# EAGLE board schematic (EAGLE 8.7.1)
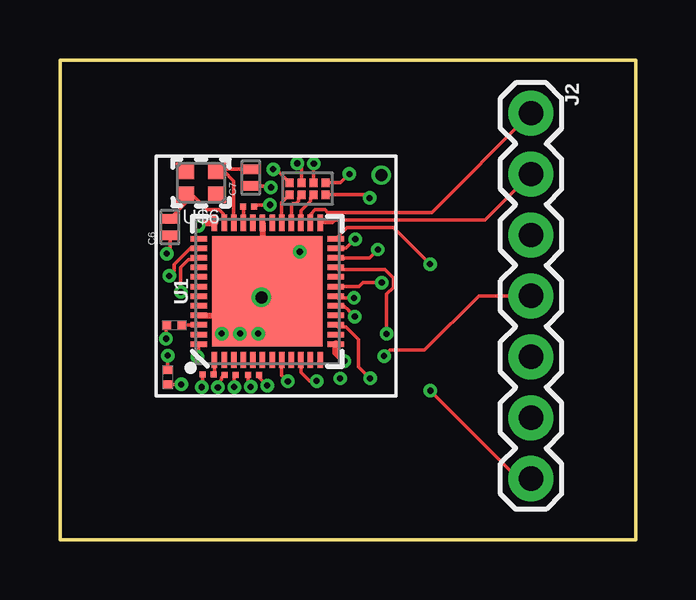
[diagram p0: board, top side]
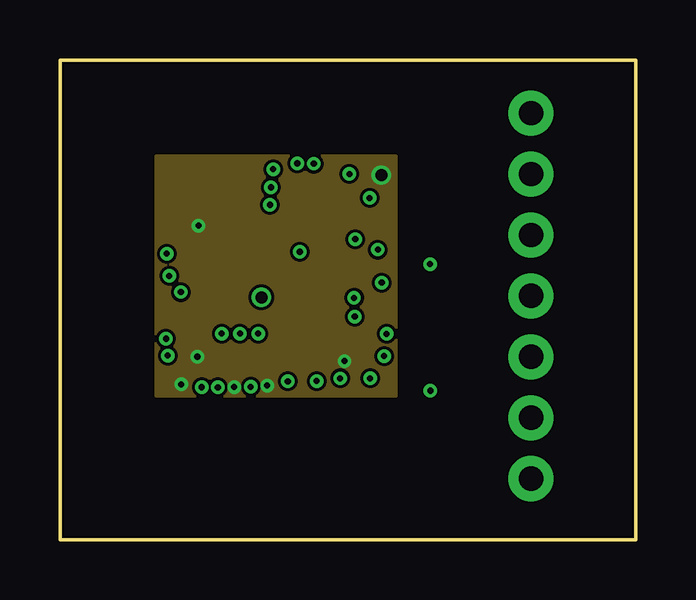
[diagram p1: board, inner layer Route8]
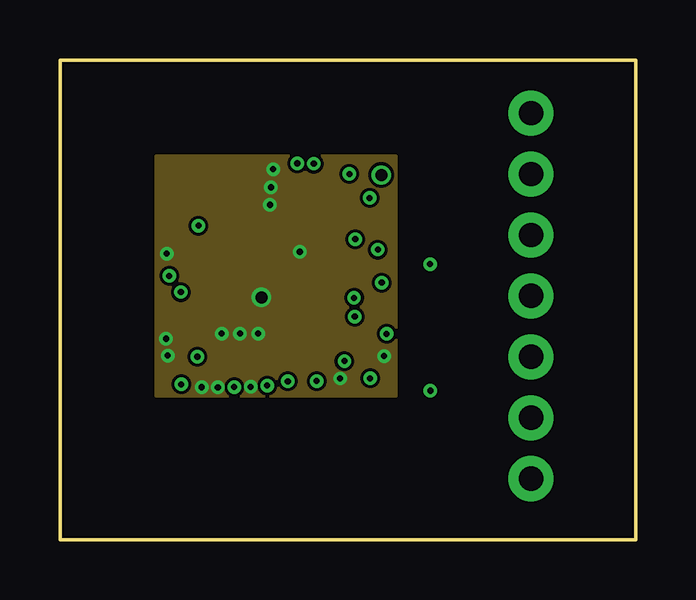
[diagram p2: board, inner layer Route10]
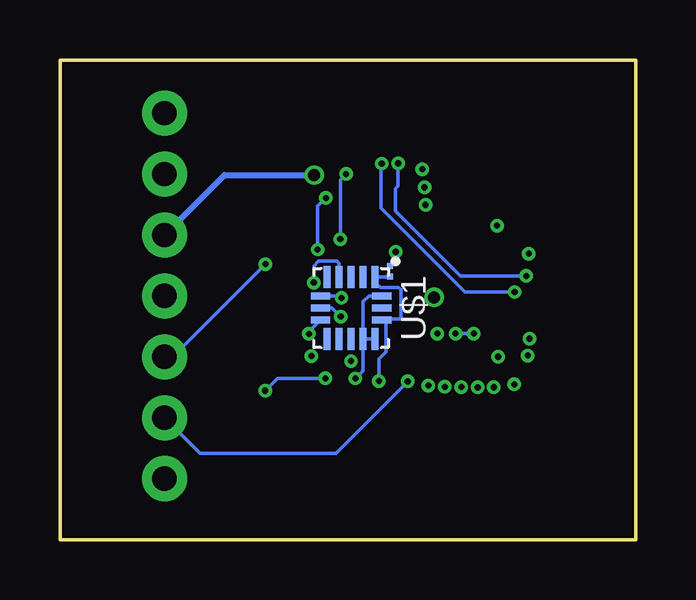
[diagram p3: board, bottom side, seen from below]

Size 24 x 20 mm. Coordinates in mm from the lower left corner, seen from the top.
Outline: 0,0 24,0 24,20 0,20 0,0
Copper layers (1*8*10*16): Top 0.035mm / dielectric 0.42mm / Route8 0.035mm / dielectric 0.62mm / Route10 0.035mm / dielectric 0.42mm / Bottom 0.035mm
Design rules "default *": minimum track width 6mil, minimum drill 10mil, track to track 5mil, track to pad 5mil, pad to pad 5mil, via to via 5mil, smd to smd 2mil, copper to edge 40mil, drill to drill 6mil, minimum pad ring 10mil, minimum via ring 6mil, stop-mask expansion 4mil, vias tented up to drill 0mil, thermal gap 10mil

## Footprints (pad centres in the part's own frame; a part is rotated, then mirrored left to right if it is on the bottom)
CAP_0402-L = smd 0.25 x 0.25: 1 -0.229,0; 2 0.229,0
CAPC1005X55N = smd 0.4 x 0.6: 1 -0.4,0; 2 0.3,0
1X07 = drill 1.016 pad 1.88: 1 0,0; 2 2.54,0; 3 5.08,0; 4 7.62,0; 5 10.16,0; 6 12.7,0; 7 15.24,0
QFN48-6X6MM = smd 0.68 x 0.23: 1 -2.86,2.2; 2 -2.86,1.8; 3 -2.86,1.4; 4 -2.86,1; 5 -2.86,0.6; 6 -2.86,0.2; 7 -2.86,-0.2; 8 -2.86,-0.6; 9 -2.86,-1; 10 -2.86,-1.4; 11 -2.86,-1.8; 12 -2.86,-2.2; 25 2.86,-2.2; 26 2.86,-1.8; 27 2.86,-1.4; 28 2.86,-1; 29 2.86,-0.6; 30 2.86,-0.2; 31 2.86,0.2; 32 2.86,0.6; 33 2.86,1; 34 2.86,1.4; 35 2.86,1.8; 36 2.86,2.2 | smd 0.23 x 0.68: 13 -2.2,-2.86; 14 -1.8,-2.86; 15 -1.4,-2.86; 16 -1,-2.86; 17 -0.6,-2.86; 18 -0.2,-2.86; 19 0.2,-2.86; 20 0.6,-2.86; 21 1,-2.86; 22 1.4,-2.86; 23 1.8,-2.86; 24 2.2,-2.86; 37 2.2,2.86; 38 1.8,2.86; 39 1.4,2.86; 40 1,2.86; 41 0.6,2.86; 42 0.2,2.86; 43 -0.2,2.86; 44 -0.6,2.86; 45 -1,2.86; 46 -1.4,2.86; 47 -1.8,2.86; 48 -2.2,2.86 | smd 4.6 x 4.6: EP 0,0
TFLGA-16/3.3MMX3.1MM = smd 0.3 x 0.8: CS 0.5,-1.275; GND@3 -0.5,1.275; MISO 0,-1.275; MOSI -0.5,-1.275; NC@2 0,1.275; VS 0.5,1.275 | smd 0.925 x 0.3: GND@1 1.288,0.5; GND@2 1.288,1; INT1 1.288,0; INT2 1.288,-1; NC@1 -1.288,0.5; RESERVED@1 -1.288,0; RESERVED@2 -1.288,-1; RESERVED@3 1.288,-0.5; SCLK -1.288,-0.5; VDD/IO -1.288,1
4P7UFCAPACITOR = smd 0.35 x 0.4: P$3 0.18,0.15; P$4 0.8,0.15
AT25SF161-UUD-T = smd 0.35 x 0.35: 1 1.2,0.9; 2 1.2,0.4; 3 1.2,-0.1; 4 1.2,-0.6; 5 0.7,0.9; 6 0.7,0.4; 7 0.7,-0.1; 8 0.7,-0.6
32MHZCRYSTAL = smd 0.75 x 0.7: 1 0.485,0.47; 2 1.835,0.47; 3 1.835,1.47; 4 0.485,1.47
1UFCAPACITOR = smd 0.35 x 0.4: P$3 0.18,0.15; P$4 0.8,0.15

## Placement (x,y rotation side)
C1  C0402X5R0G104M020BCCAP_0402-L  [CAP_0402-L]  10.24,11.19 270 bottom
C2  C0402X5R0G104M020BCCAP_0402-L  [CAP_0402-L]  6.19,6.88 180 top
C3  C0402X5R0G104M020BCCAP_0402-L  [CAP_0402-L]  8.07,6.87 0 top
C4  C0402X5R0G104M020BCCAP_0402-L  [CAP_0402-L]  7.09,6.87 0 top
C5  C0402C0G1C101J020BCCAP_0402-L  [CAP_0402-L]  7.86,13.88 0 top
C6  GRM1555C1H6R0CA01D  [CAPC1005X55N]  4.59,13.08 90 top
C7  GRM1555C1H6R0CA01D  [CAPC1005X55N]  7.96,15.14 90 top
J2  header  [1X07]  19.64,17.78 270 top
U1  NRF52832  [QFN48-6X6MM]  8.65,10.35 90 top
U$1  ADXL362  [TFLGA-16/3.3MMX3.1MM]  11.86,9.66 270 bottom
U$2  4P7UFCAPACITOR  [4P7UFCAPACITOR]  4.65,6.28 90 top
U$3  AT25SF161-UUD-T  [AT25SF161-UUD-T]  10.17,15.58 270 top
U$6  32MHZCRYSTAL  [32MHZCRYSTAL]  7.05,15.85 180 top
U$7  1UFCAPACITOR  [1UFCAPACITOR]  4.27,8.79 0 top

## Library data of the parts
C1-C4 = 0p1_uF_capacitor; MANUFACTURER_PART_NUMBER: C0402C0G1C101J020BC; VENDOR: TDK
C5 = 100_pF_capacitor; MANUFACTURER_PART_NUMBER: C0402C0G1C101J020BC; VENDOR: TDK
C6 C7 = 6pf_capacitor_new-bigger; DESCRIPTION: 0402 6 pF 50 V ±0.25 pF Tolerance C0G SMT Multilayer Ceramic Capacitor; DIGI-KEY_PART_NUMBER: 490-8222-1-ND; DIGI-KEY_PURCHASE_URL: https://www.digikey.com/product-detail/en/murata-electronics-north-america/GRM1555C1H6R0CA01D/490-8222-1-ND/4380516?WT.z_cid=ref_snapeda&utm_source=snapeda&utm_medium=aggregator&utm_campaign=buynow; MF: Murata; MP: GRM1555C1H6R0CA01D; PACKAGE: 0402 Murata
J2 = SparkFun-Connectors
U1 = nrf52832-breakout-temp; PROD_ID: IC-13460
U$1 = ADXL362
U$2 = 4p7_uF_capacitor
U$3 = AT25SF161-UUD-T
U$6 = 32_mhz_crystal
U$7 = 1_uF_capacitor

## Nets
ADXL_POWER-QFAA: C1.2 U1.10 U$1.VDD/IO U$1.VS
ANT-QFAA: U1.30
CS-QFAA: U1.21 U$1.CS
CS_FLASH: U1.23 U$3.5
DEC1-QFAA: C2.1 U1.1
DEC3-QFAA: C5.1 U1.33
DEC4-QFAA: U1.46 U$7.P$4
FLASH_POWER: U1.22 U$3.1
GND: C1.1 C2.2 C3.1 C4.1 C5.2 C6.1 C7.1 J2.4 U1.31 U1.45 U1.EP U$1.GND@1 U$1.GND@2 U$1.GND@3 U$2.P$4 U$3.8 U$7.P$3
HOLD_FLASH: U1.27 U$3.2
MISO-QFAA: U1.17 U$1.MISO
MOSI-QFAA: U1.18 U$1.MOSI
P0.06-QFAA: J2.6 U1.8
P0.12-QFAA: J2.7 U1.15
RESET-QFAA: J2.5 U1.24
SCK_FLASH: U1.28 U$3.3
SCLK-QFAA: U1.19 U$1.SCLK
SI_FLASH: U1.29 U$3.4
SO_FLASH: U1.39 U$3.6
SWDCLK-QFAA: J2.2 U1.25
SWDIO-QFAA: J2.1 U1.26
VDD: C3.2 C4.2 J2.3 U1.13 U1.36 U1.48 U$2.P$3
WP_FLASH: U1.38 U$3.7
XC1-QFAA: C7.2 U1.34 U$6.1
XC2-QFAA: C6.2 U1.35 U$6.3

## Tracks (layer width: path | path; a pad name or v marks a point on that pad's centre or on a via)
ADXL_POWER-QFAA  (via drill 0.25)
  Top 0.152: U1.10 10.05,6.96 10.4,6.61 v10.71,6.61
  Bottom 0.152: C1.2 10.25,10.94 U$1.VDD/IO 10.86,10.72 10.64,10.51 9.88,10.51 9.79,10.42 9.79,9.2 10.4,9.2 | 10.4,9.2 10.54,9.2 U$1.VS | v10.71,6.61 10.71,7.52 10.4,7.83 10.4,9.2
CS-QFAA  (via drill 0.25 pad 0.46)
  Top 0.152: U1.21 11.59,11.27 13.54,11.27 13.9,10.91 13.9,10.51 13.62,10.23 v13.62,8.57
  Bottom 0.152: v13.62,8.57 13.62,8.67 U$1.CS
CS_FLASH  (via drill 0.25 pad 0.46)
  Top 0.152: U1.23 11.93,12.15 v12.31,12.53 | v12.07,15.24 11.71,14.88 U$3.5
  Bottom 0.152: v12.31,12.53 12.31,15 v12.07,15.24
DEC1-QFAA
  Top 0.152: C2.1 6.45,6.91 U1.1
DEC3-QFAA
  Top 0.152: U1.33 7.65,13.87 C5.1
DEC4-QFAA
  Top 0.152: U$7.P$4 5.78,8.94 U1.46
FLASH_POWER  (via drill 0.25 pad 0.46)
  Top 0.152: U$3.1 12.78,14.38 v12.91,14.24 | v13.25,12.09 12.91,11.75 U1.22
  Bottom 0.152: v12.91,14.24 13.25,13.9 v13.25,12.09
GND  (via drill 0.25, 0.25 pad 0.46, 0.25 pad 0.51, 0.5 pad 0.46)
  Top 0.152: U$7.P$3 4.42,8.91 v4.42,8.38 | U$2.P$4 v4.5,7.67 | v13.52,7.65 13.76,7.9 15.2,7.9 17.46,10.16 J2.4 | 8.41,10.12 8.45,10.15 8.45,10.55 U1.EP v8.4,10.1 | v8.4,10.1 6.89,8.59 v6.74,8.59 | v7.5,8.59 v8.27,8.59 | C3.1 7.84,6.48 v7.95,6.37 | C4.1 6.74,6.76 6.74,6.67 6.58,6.51 v6.58,6.35 | C2.2 5.96,6.4 v5.91,6.35 | C5.2 8.17,13.96 v8.75,13.96 | C7.1 8.74,14.74 v8.8,14.69 | U$3.8 9.01,15.45 v8.89,15.45 | C6.1 4.59,12.05 v4.46,11.92 | 8.45,12.5 8.4,12.45 v8.4,10.1
  Top 0.254: U1.31 8.45,12.5 8.45,10.55 | U1.45 7.65,9.35 v8.4,10.1 8.41,10.12 U1.EP
  Bottom 0.152: C1.1 10,11.65 v10,12 | U$1.GND@2 U$1.GND@1 | U$1.GND@1 11.36,7.04 v11.68,6.72 | v6.74,8.59 v7.5,8.59 | U$1.GND@1 11.36,9.92 11.12,10.16 U$1.GND@3
  pour Route10: 4,16 4,6 14,6 14,16
HOLD_FLASH
  Top 0.152: U$3.2 10.45,14.26 10.45,14.12 10.05,13.71 U1.27
MISO-QFAA  (via drill 0.25 pad 0.46)
  Top 0.152: v12.29,9.3 12.05,9.54 12.05,9.55 11.85,9.75 U1.17
  Bottom 0.152: v12.29,9.3 12.65,9.66 U$1.MISO
MOSI-QFAA  (via drill 0.25 pad 0.46)
  Top 0.152: U1.18 11.58,10.07 v12.26,10.07
  Bottom 0.152: v12.26,10.07 12.34,10.16 U$1.MOSI
P0.06-QFAA  (via drill 0.25 pad 0.46)
  Top 0.152: U1.8 9.25,6.85 v9.5,6.6
  Bottom 0.152: v9.5,6.6 12.5,3.6 18.16,3.6 J2.6
P0.12-QFAA  (via drill 0.25 pad 0.46)
  Top 0.152: v12.93,6.72 12.45,7.2 12.45,8.35 11.93,8.87 11.59,8.87 U1.15 | v15.44,6.21 19.11,2.54 J2.7
  Bottom 0.152: v12.93,6.72 14.93,6.72 v15.44,6.21
RESET-QFAA  (via drill 0.25)
  Top 0.152: U1.24 11.97,13.01 13.91,13.01 v15.43,11.49
  Bottom 0.152: v15.43,11.49 19.3,7.62 J2.5
SCK_FLASH
  Top 0.152: U1.28 9.65,13.95 9.7,14 9.83,14 9.95,14.12 9.95,14.26 U$3.3
SCLK-QFAA  (via drill 0.25 pad 0.46)
  Top 0.152: U1.19 12.05,10.55 12.06,10.56 12.46,10.56 12.47,10.55 12.48,10.55 12.64,10.71 v13.41,10.71
  Bottom 0.152: v13.41,10.71 13.41,11.41 13.22,11.61 12.45,11.61 12.36,11.52 U$1.SCLK
SI_FLASH
  Top 0.152: U1.29 9.25,14.05 U$3.4
SO_FLASH  (via drill 0.25 pad 0.46)
  Top 0.152: U1.39 5.7,11.67 5.36,11.67 5.04,11.35 v5.04,10.32 | v10.58,15.68 10.57,15.67 U$3.6
  Bottom 0.152: v5.04,10.32 7.11,10.32 10.62,13.83 10.62,15.64 v10.58,15.68
SWDCLK-QFAA
  Top 0.152: U1.25 11.36,13.21 11.47,13.32 17.71,13.32 J2.2
SWDIO-QFAA
  Top 0.152: U1.26 10.45,13.56 10.64,13.75 11.04,13.75 11.16,13.64 15.5,13.64 J2.1
VDD  (via drill 0.25, 0.25 pad 0.46, 0.25 pad 0.51, 0.5 pad 0.46)
  Top 0.152: U1.48 5.79,7.68 v5.73,7.62 | U$2.P$3 5.05,6.46 v5.06,6.48 | C3.2 8.29,6.77 v8.64,6.42 | C4.2 7.27,6.83 v7.27,6.36
  Top 0.305: U1.36 5.89,13.21 v5.77,13.09 | U1.13 11.51,7.8 v11.86,7.44
  Route8 0.152: v5.73,7.62 v5.73,7.63
  Bottom 0.254: J2.3 17.14,15.2 v13.4,15.2
  pour Route8: 4,16 14,16 14,6 4,6
WP_FLASH  (via drill 0.25 pad 0.46)
  Top 0.152: v4.56,11 4.76,11.2 4.76,11.47 5.44,12.15 U1.38 | v9.9,15.69 10.07,15.51 U$3.7
  Bottom 0.152: v4.56,11 7.3,11 10,13.7 10,14.64 9.9,14.75 v9.9,15.69
XC1-QFAA
  Top 0.152: C7.2 6.63,15.44 U$6.1 6.81,15.38 7.25,14.95 U1.34
XC2-QFAA
  Top 0.152: U1.35 6.8,13.25 6.8,13.6 6.64,13.75 6.13,13.75 5.51,14.38 U$6.3 5.21,14.01 C6.2